# EAGLE board main (EAGLE 9.6.2)
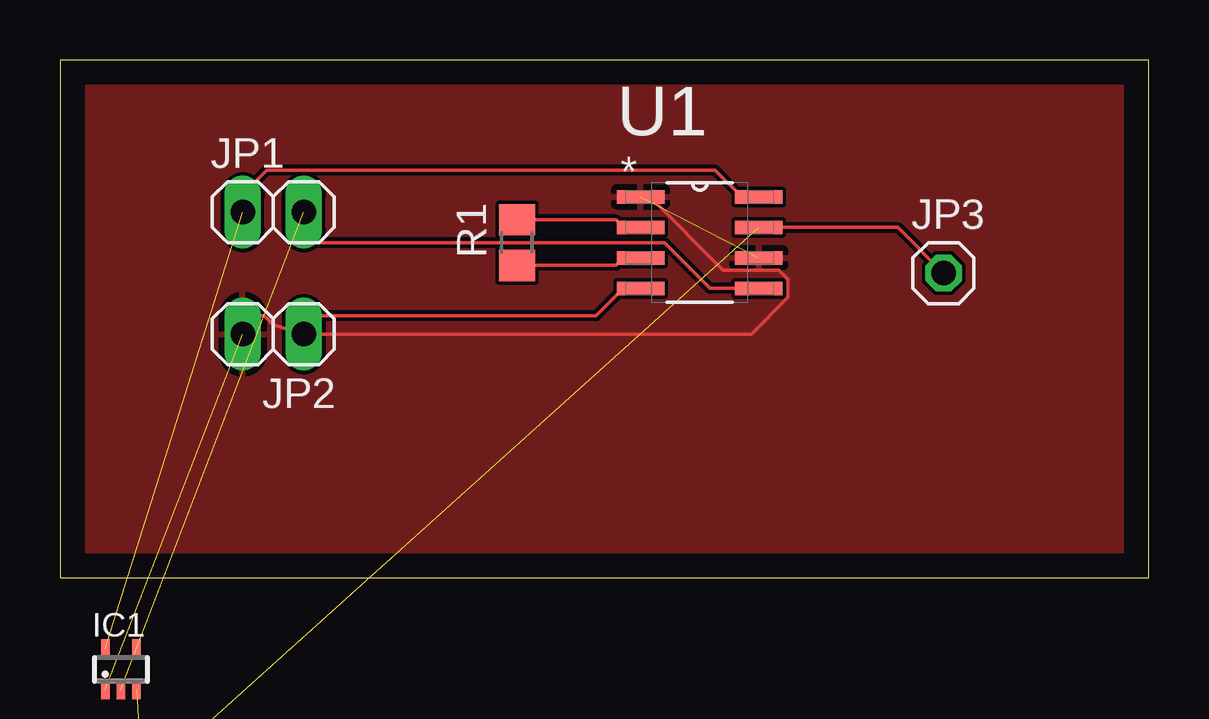
[diagram p0: board, top side]

Size 45.39 x 21.58 mm. Coordinates in mm from the lower left corner, seen from the top.
Outline: 0,0 45.39,0 45.39,21.58 0,21.58 0,0
Copper layers (1*16): Top 0.035mm / dielectric 1.5mm / Bottom 0.035mm
Design rules "default": minimum track width 6mil, minimum drill 0.35mm, track to track 6mil, track to pad 6mil, pad to pad 6mil, via to via 6mil, smd to smd 6mil, copper to edge 40mil, drill to drill 6mil, minimum pad ring 10mil, minimum via ring 8mil, stop-mask expansion 4mil, vias tented up to drill 0mil, thermal gap 10mil

## Footprints (pad centres in the part's own frame; a part is rotated, then mirrored left to right if it is on the bottom)
SC70-5L = smd 0.35 x 0.8: 1 -0.65,-0.85; 2 0,-0.85; 3 0.65,-0.85; 4 0.65,0.85; 5 -0.65,0.85
1X02 = drill 1.016 long: 1 -1.27,0; 2 1.27,0
1X01 = drill 1.016 octagon: 1 0,0
R0805 = smd 1.3 x 1.5: 1 -0.95,0; 2 0.95,0
SOIC127P600X175-8N = smd 1.981 x 0.559: 1 -2.464,1.905; 2 -2.464,0.635; 3 -2.464,-0.635; 4 -2.464,-1.905; 5 2.464,-1.905; 6 2.464,-0.635; 7 2.464,0.635; 8 2.464,1.905

## Placement (x,y rotation side)
IC1  LMV321M7  [SC70-5L]  2.54,-3.81 0 top
JP1  [1X02]  8.89,15.24 0 top
JP2  [1X02]  8.89,10.16 180 top
JP3  [1X01]  36.83,12.7 0 top
R1  24K  [R0805]  19.05,13.97 90 top
R2  10k  [R0805]  2.54,-10.16 0 top  (outside the outline)
U1  AD8226ARZ-R7  [SOIC127P600X175-8N]  26.67,13.97 0 top

## Library data of the parts
IC1 = LMV321__; AVAILABILITY: Not in stock; DESCRIPTION: General Purpose Amplifier 1 Circuit Rail-to-Rail SOT-23-5; MF: STMicroelectronics; MP: LMV321; PACKAGE: SOT-23-5 STMicroelectronics; PRICE: None
JP1-JP3 = pinhead
R1 R2 = rcl; SPICEPREFIX: R
U1 = Analog Devices_By_element14_Batch_1; MPN: AD8226ARZ-R7; OC_FARNELL: -; OC_NEWARK: 71P7872; PACKAGE: SOIC-8; SUPPLIER: Analog Devices

## Nets
GND: IC1.1 JP2.2 U1.1 U1.6
N$1: R1.2 U1.2
N$2: R1.1 U1.3
N$3: JP2.1 U1.4
N$4: IC1.3 R2.2
N$5: JP3.1 R2.1 U1.7
V+: IC1.5 JP1.1 U1.8
V-: IC1.2 JP1.2 U1.5

## Tracks (layer width: path | path; a pad name or v marks a point on that pad's centre or on a via)
GND  (2 unrouted)
  Top 0.152: U1.1 24.59,15.88 27.64,12.83 29.96,12.83 30.35,12.44 30.35,11.69 28.82,10.16 10.16,10.16 8.89,10.54 8.51,10.92 7.62,10.92 JP2.2
  pour Top: 0,21.58 0,0 45.39,0 45.39,21.58
N$1
  Top 0.152: U1.2 23.5,14.61 23.18,14.92 R1.2
N$2
  Top 0.152: U1.3 23.5,13.34 23.18,13.02 R1.1
N$3
  Top 0.152: U1.4 23.5,12.06 22.35,10.92 10.16,10.92 JP2.1
N$4  (1 unrouted)
N$5  (1 unrouted)
  Top 0.152: U1.7 34.92,14.61 JP3.1
V+  (1 unrouted)
  Top 0.152: U1.8 28.42,15.88 27.3,16.99 8.61,16.99 7.62,16 JP1.1
V-  (1 unrouted)
  Top 0.152: U1.5 27.1,12.06 25.2,13.97 10.67,13.97 10.16,14.48 JP1.2